# Altium PCB RA08T.PcbDoc
Units mm, origin at the board's own origin, x right, y up, seen from the top; angles counter-clockwise.
Board outline 67 x 48 mm, 2 copper layers (TOP, BOTTOM), stack 1.486 mm thick; 22 components, 20 nets, 87 pads, 6 vias.
Unrouted connection lines stored in the file: 21.
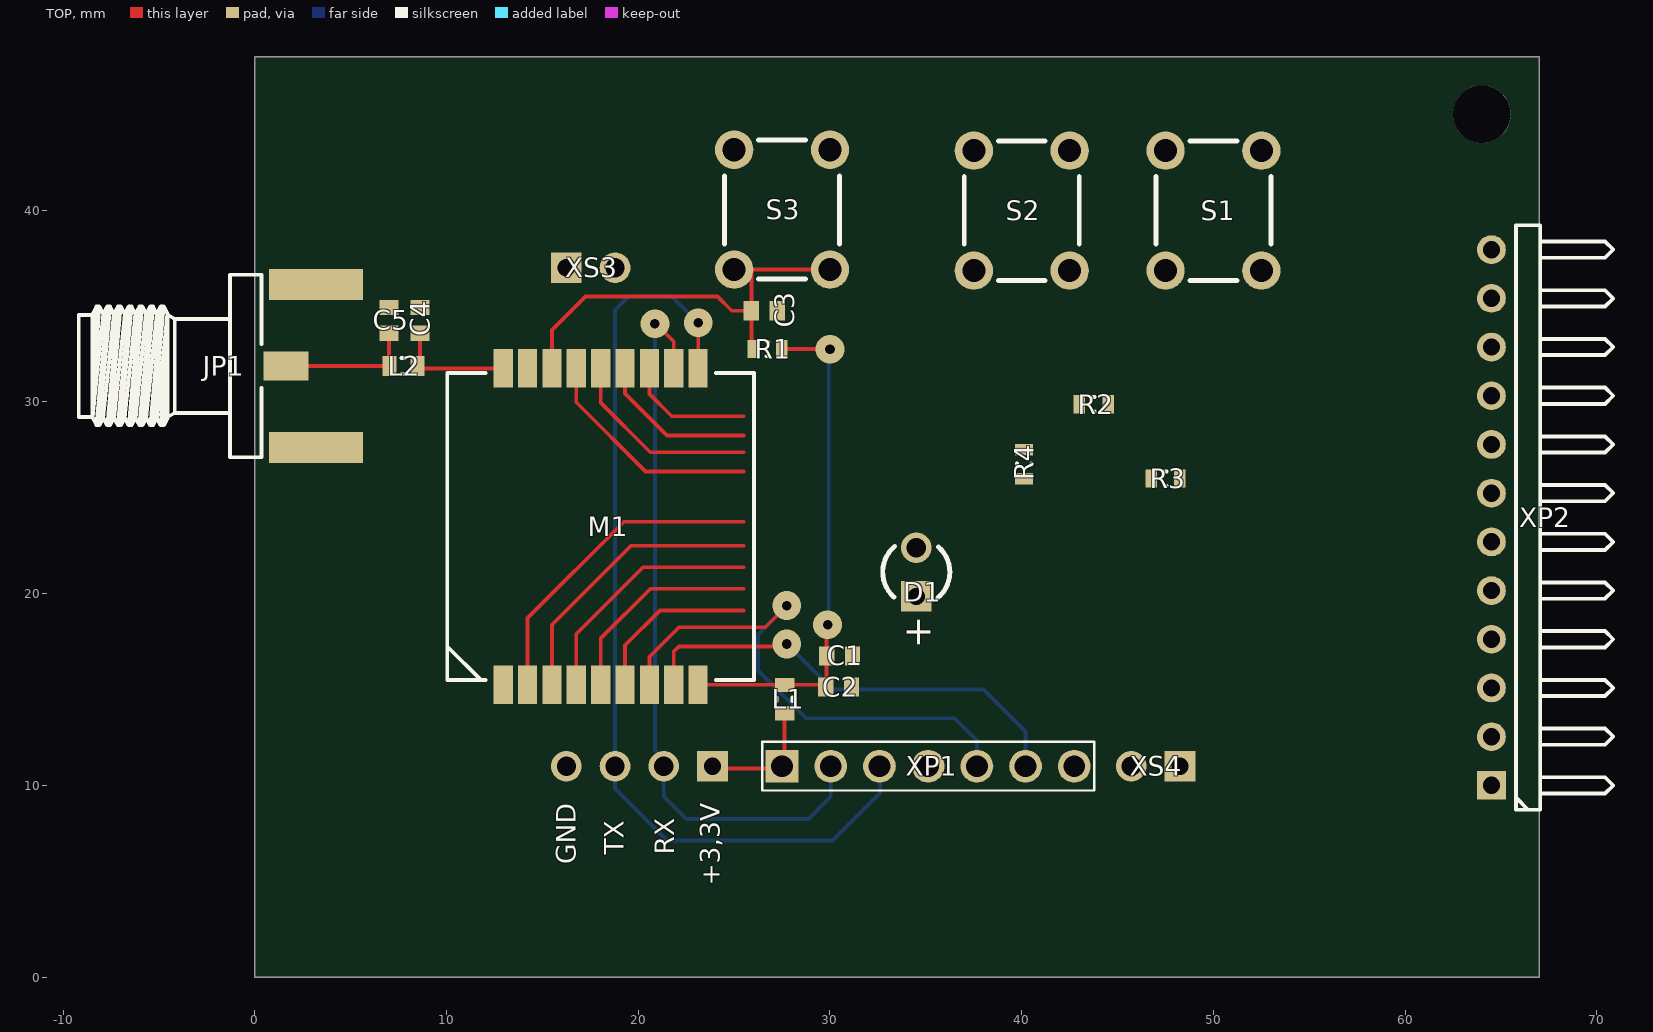
[diagram p0: TOP view]
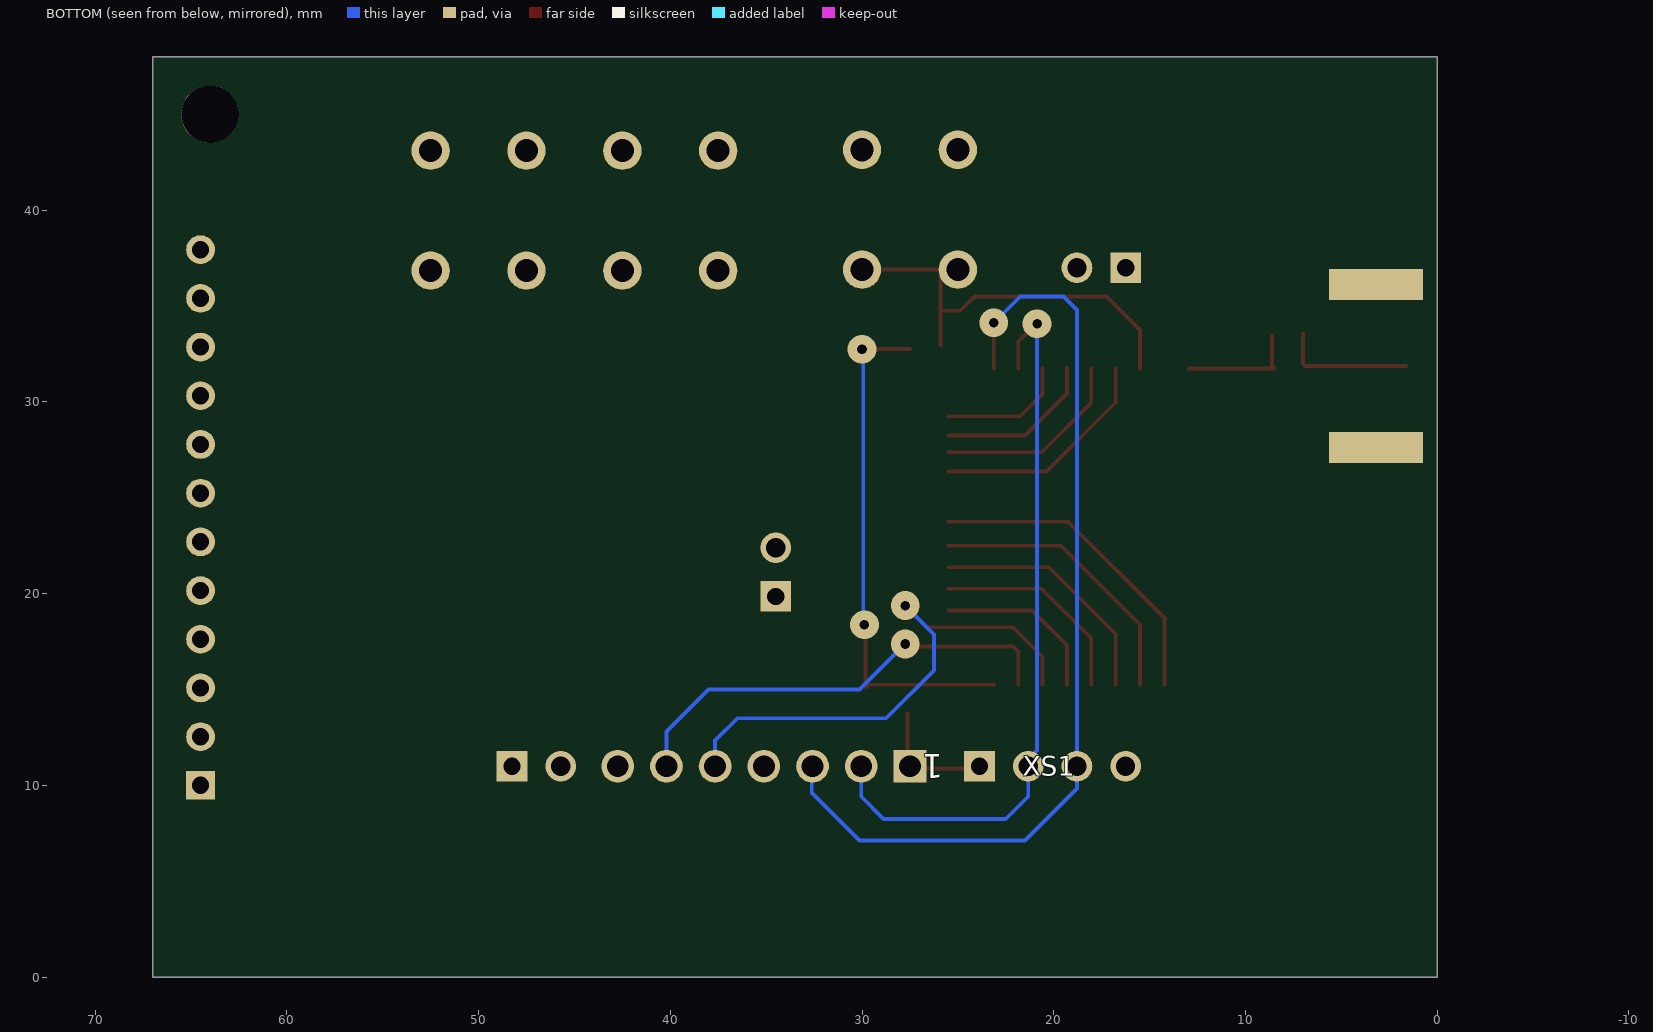
[diagram p1: BOTTOM view, seen from below]
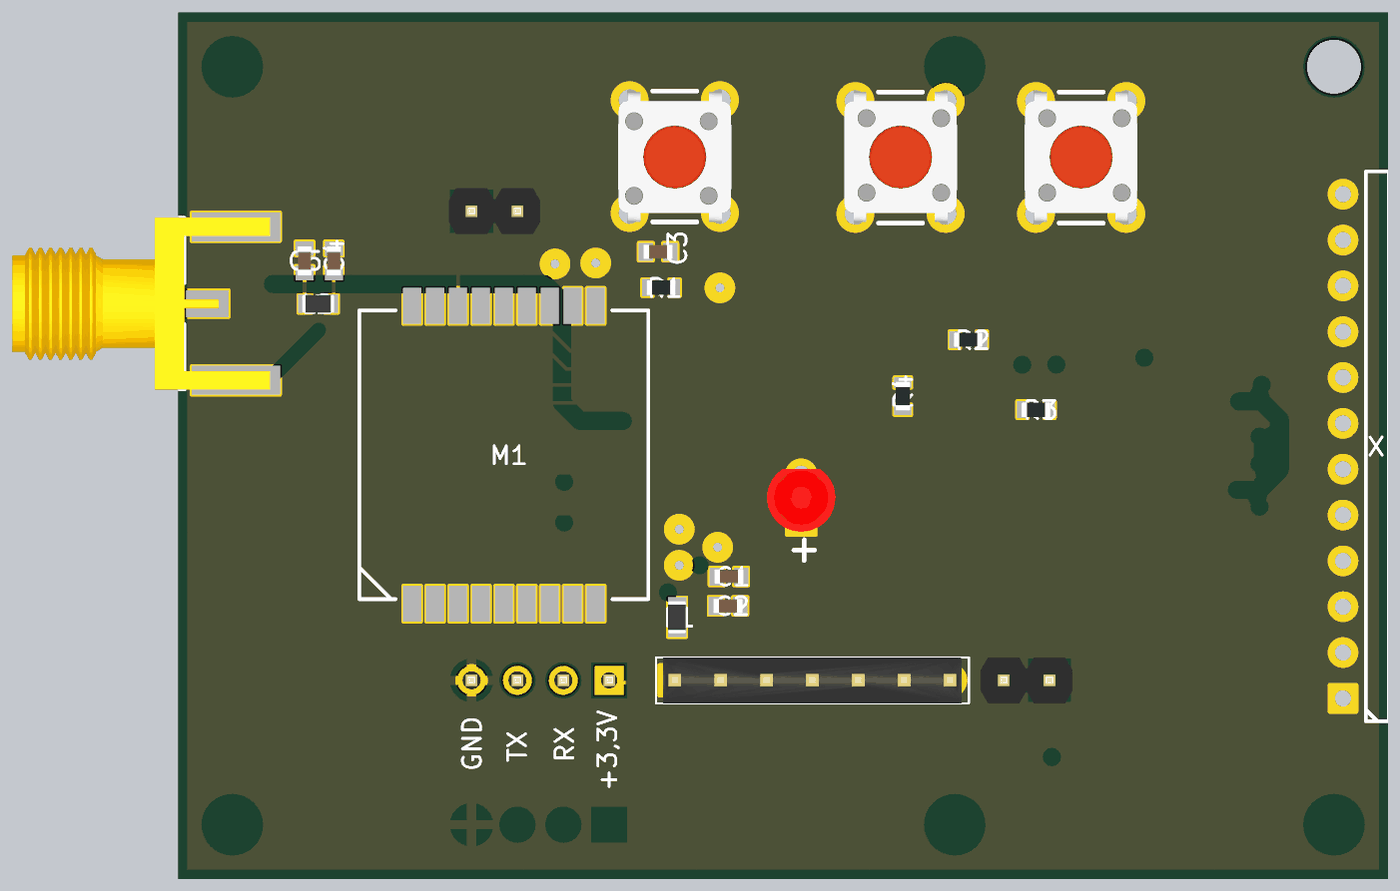
[diagram p2: 3D render of the assembled board from above, using the file's embedded part models]

## Layer stack, top to bottom
Top Solder: solder mask 0.0102, Solder Resist, Dk 3.5
TOP: signal copper 0.018
Dielectric1: core 1.45, FR-4, Dk 4.2
BOTTOM: signal copper 0.018
Bottom Solder: solder mask 0.0102, Solder Resist, Dk 3.5

## Board outline
0,0 67,0 67,48 0,48

## Design rules (kind name [scope] priority, off if disabled: settings)
AssemblyTestPointUsage [All] p1 off:
AssemblyTestpoint [All] p1 off: testpointundercomponent=TRUE minsize=1.016 maxsize=2.54 preferedsize=1.524 minholesize=0 maxholesize=1.016 preferedholesize=0.813 testpointgrid=0.025 usegrid=TRUE gridtolerance=0 allowsidetop=TRUE allowsidebottom=TRUE
BoardOutlineClearance [All] p1: gap=0.5 ignorepadtopadclearanceinfootprint=FALSE
Clearance Clearance_Polygon [InPolygon] p1: gap=0.2 ignorepadtopadclearanceinfootprint=FALSE
Clearance [All] p2: gap=0.2 ignorepadtopadclearanceinfootprint=FALSE
ComponentClearance [All] p1: gap=-5 collisioncheckmode=3 verticalgap=-5 showdistances=TRUE
FabricationTestPointUsage [All] p1 off: valid=0 allowmultiple=FALSE
FabricationTestpoint [All] p1 off: side=3 testpointundercomponent=TRUE minsize=1.016 maxsize=2.54 preferedsize=1.524 minholesize=0 maxholesize=1.016 preferedholesize=0.813 testpointgrid=0.025 allowsidetop=TRUE allowsidebottom=TRUE usegrid=TRUE gridtolerance=0
HoleSize [All] p1: absolutevalues=TRUE maxlimit=8 minlimit=0.025 maxpercent=80.000 minpercent=20.000
HoleToHoleClearance [All] p1: gap=0.25 allowstackedmicrovias=TRUE
MinimumSolderMaskSliver [All] p1: minsoldermaskwidth=0
PlaneClearance [All] p1: clearance=0.5
PlaneConnect [All] p1: planeconnectstyle=Relief reliefexpansion=0.5 reliefentries=4 reliefconductorwidth=0.5 reliefairgap=0.5
PolygonConnect PolygonConnect_via [isVia] p1: connectstyle=Direct reliefconductorwidth=0.254 reliefentries=4 polygonreliefangle="90 Angle" airgapwidth=0.254
PolygonConnect [All] p2: connectstyle=Relief reliefconductorwidth=0.5 reliefentries=4 polygonreliefangle="90 Angle" airgapwidth=0.4
RoutingCorners [All] p1: cornerstyle=45-Degree minsetback=2.5 maxsetback=2.5
RoutingVias [All] p1: holewidth=0.3 width=0.7 viastyle="Through Hole" minholewidth=0.2 minwidth=0.5 maxholewidth=0.4 maxwidth=0.8
SilkToSilkClearance [All] p1: silktosilkclearance=0
SilkToSolderMaskClearance [IsPad] p1: minsilkscreentomaskgap=-1 clearancetoexposedcopper=TRUE
SolderMaskExpansion [All] p1: expansion=0.1 istentingtop=FALSE
Width [All] p1: maxlimit=2 minlimit=0.15 preferedwidth=0.2 minimp=50.000000 maximp=50.000000 favimp=50.000000
17 further rules are at their usual default settings.

## Components (designator, comment, footprint, x,y, rotation, side; value= is the part's Value field where it differs from the comment)
C1 "1u" C-0603 30.5,16.75 r0 top
C2 "1n" C-0603 30.45,15.125 r0 top
C3 "100n" C-0603 26.575,34.75 r0 top
C4 "nc" C-0603 8.625,34.25 r90 top
C5 "nc" C-0603 7,34.25 r90 top
D1 "LED3mm" LED_3mm_RED 34.5,21.125 r90 top value=GREEN
JP1 "EM-SA071-GGT" AMPHENOL_132357-11 1.625,31.875 r0 top
L1 "BEAD" L-0603 27.632,14.497 r270 top
L2 "0" L-0603 7.758,31.87 r180 top
M1 "RA-08" LGA18_RA08 18.04,23.5 r90 top
R1 "1k" R-0603 26.743,32.759 r0 top
R2 "1k" R-0603 43.75,29.875 r180 top
R3 "10k" R-0603 47.5,26 r180 top
R4 "10k" R-0603 40.125,26.75 r270 top
S1 "KLS7-TS3602 -3 15-180" KN_MIN 50,40 r90 top
S2 "KLS7-TS3602 -3 15-180" KN_MIN 40,40 r90 top
S3 "KLS7-TS3602 -3 15-180" KN_MIN 27.5,40 r270 top
XP1 "Header 7" PLS1-7 27.5,11 r0 top
XP2 "Header 12H" HDR1X12H 64.5,10 r90 top
XS1 "PLS4" "PLS4 - 3D" 23.87,11 r180 bottom locked value={Value}
XS3 "PLS2" "PLS2 - 3D" 16.25,37 r0 top locked value={Value}
XS4 "PLS2" "PLS2 - 3D" 48.25,11 r180 top locked value={Value}

## Footprints (in the part's own frame and the unit in brackets; to place one, negate y for a bottom-side part, rotate by r counter-clockwise, add the part's x,y. Pads: shape width x height; smd on the part's side, far side on the other; paste and mask are expansions set on the pad)
AMPHENOL_132357-11 [mm] "SMA End Launch Jack for 1.58mm PCB, 50 Ohm, Flat Tab Contact"
  rect 2.35x1.5 smd: 1(0,0)
  rect 4.9x1.6 smd far side: 2(1.575,-4.25) 2(1.575,4.25)
  rect 4.9x1.6 smd: 2(1.575,-4.25) 2(1.575,4.25)
  silkscreen extent -10.81,-4.76 -1.28,4.76, body extent -10.8,-4.76 3.48,4.76, height 4.08
C-0603 [mm] "Chip Capacitor, 2-Leads, Body 1,60x0,80mm, IPC Medium Density"
  rect 0.8x1 smd: 1(-0.675,0) 2(0.675,0)
  body extent -0.8,-0.4 0.8,0.4, height 0.8
HDR1X12H [mm] "Connector; Header; 12 Position; Right Angle"
  rect 1.5x1.5 hole 0.9: 1(0,0)
  round 1.5 hole 0.9: 2(2.54,0) 3(5.08,0) 4(7.62,0) 5(10.16,0) 6(12.7,0) 7(15.24,0) 8(17.78,0) 9(20.32,0) 10(22.86,0) 11(25.4,0) 12(27.94,0)
  silkscreen extent -1.27,-6.35 29.21,-1.27
KN_MIN [mm]
  round 2 hole 1.2 mask+0.05: 1(-3.15,-2.5) 2(3.1,-2.5) 3(-3.15,2.5) 4(3.1,2.5)
  silkscreen extent -3.66,-3 3.6,3, body extent -3.95,-3.1 3.95,3.1, height 7.01
L-0603 [mm] "Chip Inductor, 2-Leads, Body 1,60x0,80mm, IPC Medium Density"
  rect 0.74x1.02 smd: 1(-0.735,0) 2(0.735,0)
  silkscreen extent -0.1,-0.41 0.1,0.41, body extent -0.9,-0.5 0.9,0.5, height 1
LED_3mm_RED [mm]
  rect 1.6x1.6 hole 0.9: 1(-1.27,0)
  round 1.6 hole 1: 2(1.27,0)
  silkscreen extent -1.34,-1.75 1.34,1.75, body extent -1.9,-1.9 1.6,1.9, height 5.75
LGA18_RA08 [mm]
  rect 2x1 smd: 1(-8.25,5.08) 2(-8.25,3.81) 3(-8.25,2.54) 4(-8.25,1.27) 5(-8.25,0) 6(-8.25,-1.27) 7(-8.25,-2.54) 8(-8.25,-3.81) 9(-8.25,-5.08) 10(8.25,-5.08) 11(8.25,-3.81) 12(8.25,-2.54) 13(8.25,-1.27) 14(8.25,0) 15(8.25,1.27) 16(8.25,2.54) 17(8.25,3.81) 18(8.25,5.08)
  silkscreen extent -8,-8 8,8, body extent -7.5,-7.5 7.5,7.53, height 1.5
PLS1-7 [mm] "Header, Vertical, 2.54 mm pitch; 0.70 mm lead width, 7 pins, 1 row, 7 pins per row, 16.51 mm L X 2.54 mm W X 7.54 mm H body"
  rect 1.71x1.71 hole 1.14 paste-1.71: 1(0,0)
  round 1.71 hole 1.14 paste-1.71: 2(2.54,0) 3(5.08,0) 4(7.62,0) 5(10.16,0) 6(12.7,0) 7(15.24,0)
  silkscreen extent -1.04,-1.27 16.28,1.27, body extent -0.64,-1.27 15.88,1.27, height 7.54
"PLS2 - 3D" [mm]
  rect 1.6x1.6 hole 0.9: 1(0,0)
  round 1.6 hole 1: 2(2.54,0)
  body extent -1.27,-1.27 3.81,1.27, height 8.8
"PLS4 - 3D" [mm]
  rect 1.6x1.6 hole 0.9: 1(0,0)
  round 1.6 hole 1: 2(2.54,0) 3(5.08,0) 4(7.62,0)
  body extent -1.27,-1.27 8.89,1.27, height 8.8
R-0603 [mm] "Chip Resistor, 2-Leads, Body 1,60x0,82mm, IPC Medium Density"
  rect 0.6x0.95 smd: 1(-0.75,0) 2(0.75,0)
  silkscreen extent -0.05,-0.38 0.05,0.38, body extent -0.8,-0.4 0.8,0.4, height 0.45

## Part data
C1 C2 C3 C4 C5: library part CAPN, Voltage=50V, Вид=Конденсатор, Точність/група=NP0
JP1: library part SMA, "SMA Female R/A PCB Mount", Вид=Роз'єм
L2: library part L, Вид=Індуктивність
R1 R2 R3 R4: library part RES, Вид=Резистор, Точність/група=5%
S1 S2 S3: library part SW-1, Вид=Кнопка
XP1: "Header, 7-Pin", LatestRevisionDate=17-Jul-2002, LatestRevisionNote="Re-released for DXP Platform.", Publisher="Altium Limited"
XP2: "Header, 12-Pin, Right Angle", LatestRevisionDate=17-Jul-2002, LatestRevisionNote="Re-released for DXP Platform.", Publisher="Altium Limited"
D1 XS1 XS3 XS4: Mounting  Method=THT
L1: Вид="Ferrite bead"

## Free pads (board coordinates)
  round 3 hole 3 unplated: MH(64,45)

## Via types
v1: diameter 1.5, hole 0.5, TOP to BOTTOM, 6 vias

## Nets (pads, with @x,y where several pads share a name; then routed paths per layer and width w, separated by ;. In a path a pad name is that pad's centre, name@x,y a point inside that pad or via, vN(x,y) a via of type N, cw(c..) or ccw(c..) an arc to the next point about the centre after c; other vN are vias at no path point)
BOOT: M1.15 XP2.2 | length 12
  TOP w0.2: M1.15 16.77,29.98 20.375,26.375 25.5,26.375
GND: C1.2 C2.2 C3.2 C4.2 C5.2 JP1.2 M1.1 M1.17 S1.2 S2.2 S3.1 XP1.4 XP2.12 XS1.4 XS3.1 XS3.2 XS4.1 XS4.2
IO4: M1.5 S1.1 XP2.6 | length 10.9
  TOP w0.2: M1.5 18.04,17.665 20.625,20.25 25.5,20.25
IO5: M1.6 S2.1 XP2.7 | length 9
  TOP w0.2: M1.6 19.31,17.31 21.125,19.125 25.5,19.125
IO8: D1.2 M1.2 XP2.3 | length 16.8
  TOP w0.2: M1.2 14.23,18.73 19.25,23.75 25.5,23.75
IO9: M1.4 XP2.5 | length 12.8
  TOP w0.2: M1.4 16.77,17.895 20.25,21.375 25.5,21.375
IO11: M1.3 XP2.4 | length 14.8
  TOP w0.2: M1.3 15.5,18.375 19.625,22.5 25.5,22.5
NetC4_1: C4.1 L2.1 M1.18 | length 6.2
  TOP w0.2: C4.1@8.625,33.45 8.625,31.875 8.5,31.75 M1.18
NetC5_1: C5.1 JP1.1 L2.2 | length 7
  TOP w0.2: JP1.1 6.905,31.875 7,31.97 C5.1
NetD1_1: D1.1 R2.1
NRST: C3.1 M1.16 R1.1 S3.2 S3.4 XP1.7 | length 22.3
  TOP w0.2: M1.16 15.5,33.75 17.25,35.5 24.125,35.5 24.875,34.75 C3.1 ; S3.2 25.059,36.841 25.959,36.841 26.017,36.9 S3.4 ; R1.1@25.9,32.963 C3.1 ; S3.2@25.9,36.783 C3.1
RXD: M1.10 XP1.3 XS1.3 | length 49.9
  TOP w0.2: M1.10 23.125,31.755 v1(23.125,34.125)
  BOTTOM w0.2: v1(23.125,34.125) 21.75,35.5 19.5,35.5 18.79,34.79 XS1.3 18.79,9.835 21.5,7.125 30.125,7.125 32.625,9.625 32.625,10.955 XP1.3
RXD0: M1.12 XP2.8 | length 6.7
  TOP w0.2: M1.12 20.58,30.42 21.75,29.25 25.5,29.25
SCL: M1.14 R3.1 XP2.10 | length 10.3
  TOP w0.2: M1.14 18.04,29.96 20.625,27.375 25.5,27.375
SDA: M1.13 R4.1 XP2.9 | length 8.4
  TOP w0.2: M1.13 19.31,30.44 21.5,28.25 25.5,28.25
SWCLK: M1.7 XP1.5 | length 28
  TOP w0.2: M1.7 20.58,16.705 22.125,18.25 26.625,18.25 v1(27.75,19.375)
  BOTTOM w0.2: v1(27.75,19.375) 26.25,17.875 26.25,16 28.75,13.5 36.5,13.5 37.66,12.34 XP1.5
SWDIO: M1.8 XP1.6 | length 24.2
  TOP w0.2: M1.8 21.85,16.975 22.125,17.25 v1@27.75,17.25
  BOTTOM w0.2: v1@28.038,17.375 v1(27.75,17.375) 30.125,15 38,15 40.2,12.8 XP1.6
TXD: M1.11 XP1.2 XS1.2 | length 39.1
  TOP w0.2: v1@20.75,34.25 21.85,33.15 M1.11
  BOTTOM w0.2: v1(20.87,34.075) 20.87,11.817 21.33,11.357 XS1.2 21.33,9.42 22.5,8.25 28.875,8.25 30.04,9.415 XP1.2
VCC: L1.2 XP1.1 XP2.11 XS1.1 | length 6.9
  TOP w0.2: XS1.1 23.995,10.875 27.375,10.875 XP1.1 ; XP1.1@27.625,10.625 L1.2@27.625,13.754
VMCU: C1.1 C2.1 L1.1 M1.9 R1.2 R2.2 R3.2 R4.2 XP2.1 | length 27.1
  TOP w0.2: M1.9 27.45,15.25 28,15.25 29.65,15.25 C2.1 29.825,15.175 C1.1 29.825,18.45 v1@29.875,18.5 ; R1.2 27.503,32.75 v1(30,32.75)
  BOTTOM w0.2: v1(29.875,18.375) 29.938,18.438 29.938,32.688 v1(30,32.75)
pads on no net: S1.3 S1.4 S2.3 S2.4 S3.3

## Polygon pours and split planes (outlines as drawn)
GND on TOP "gnd_top" (solid, remove dead copper, shelved, pour order 0): 67,48 67,0 0,0 0,48
GND on BOTTOM "gnd_top" (solid, remove dead copper, shelved, pour order 2): 0,48 0,0 67,0 67,48

## Silkscreen, mask and mechanical layers (free items; w line width, h text height)
Top Overlay:
  text "TX" at 19.25,6.375 h1 r90
  text "RX" at 21.875,6.375 h1 r90
  text "GND" at 16.75,5.875 h1 r90
  text "+3,3V" at 24.25,4.775 h1 r90
Board:
  the board outline again, w0.2

## Text inside footprints (layer, text, board x,y; h text height)
D1: Top Overlay "+" at 35.25,17.125 h1.5 r90
XS1: Bottom Overlay "1" at 25.75,11.625 h1.25 r180